# Allegro board VEIP_DLK_CTRL_V00_25APR07_17V2.brd
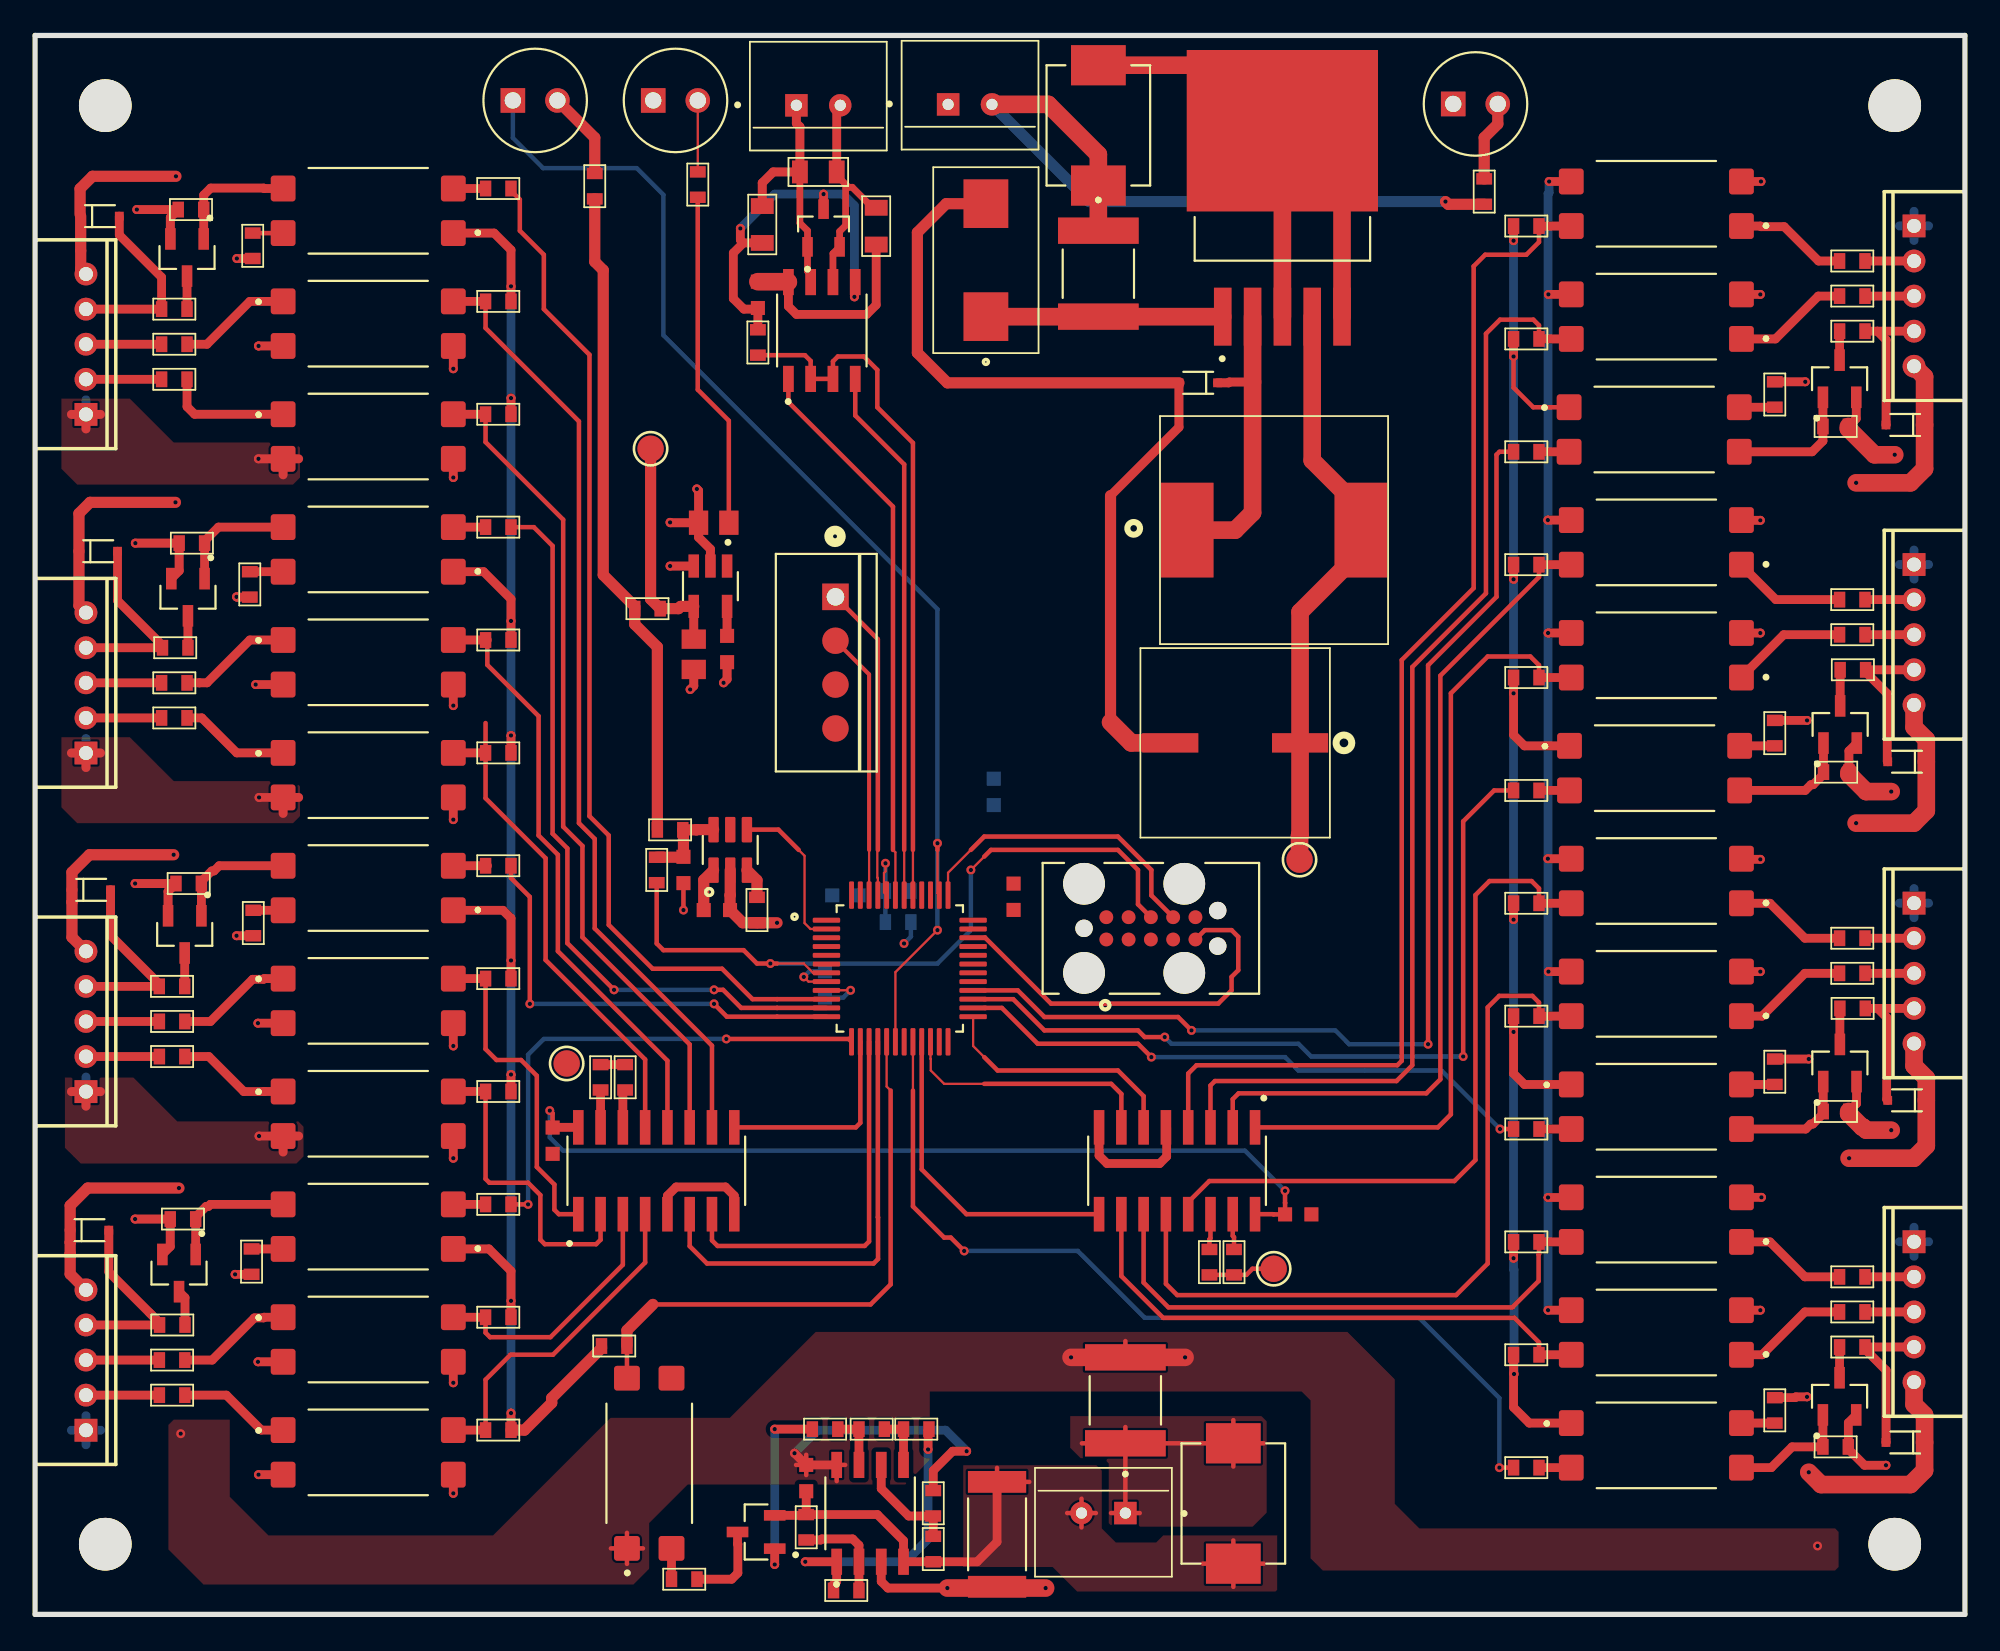
[diagram p0: board, top side]
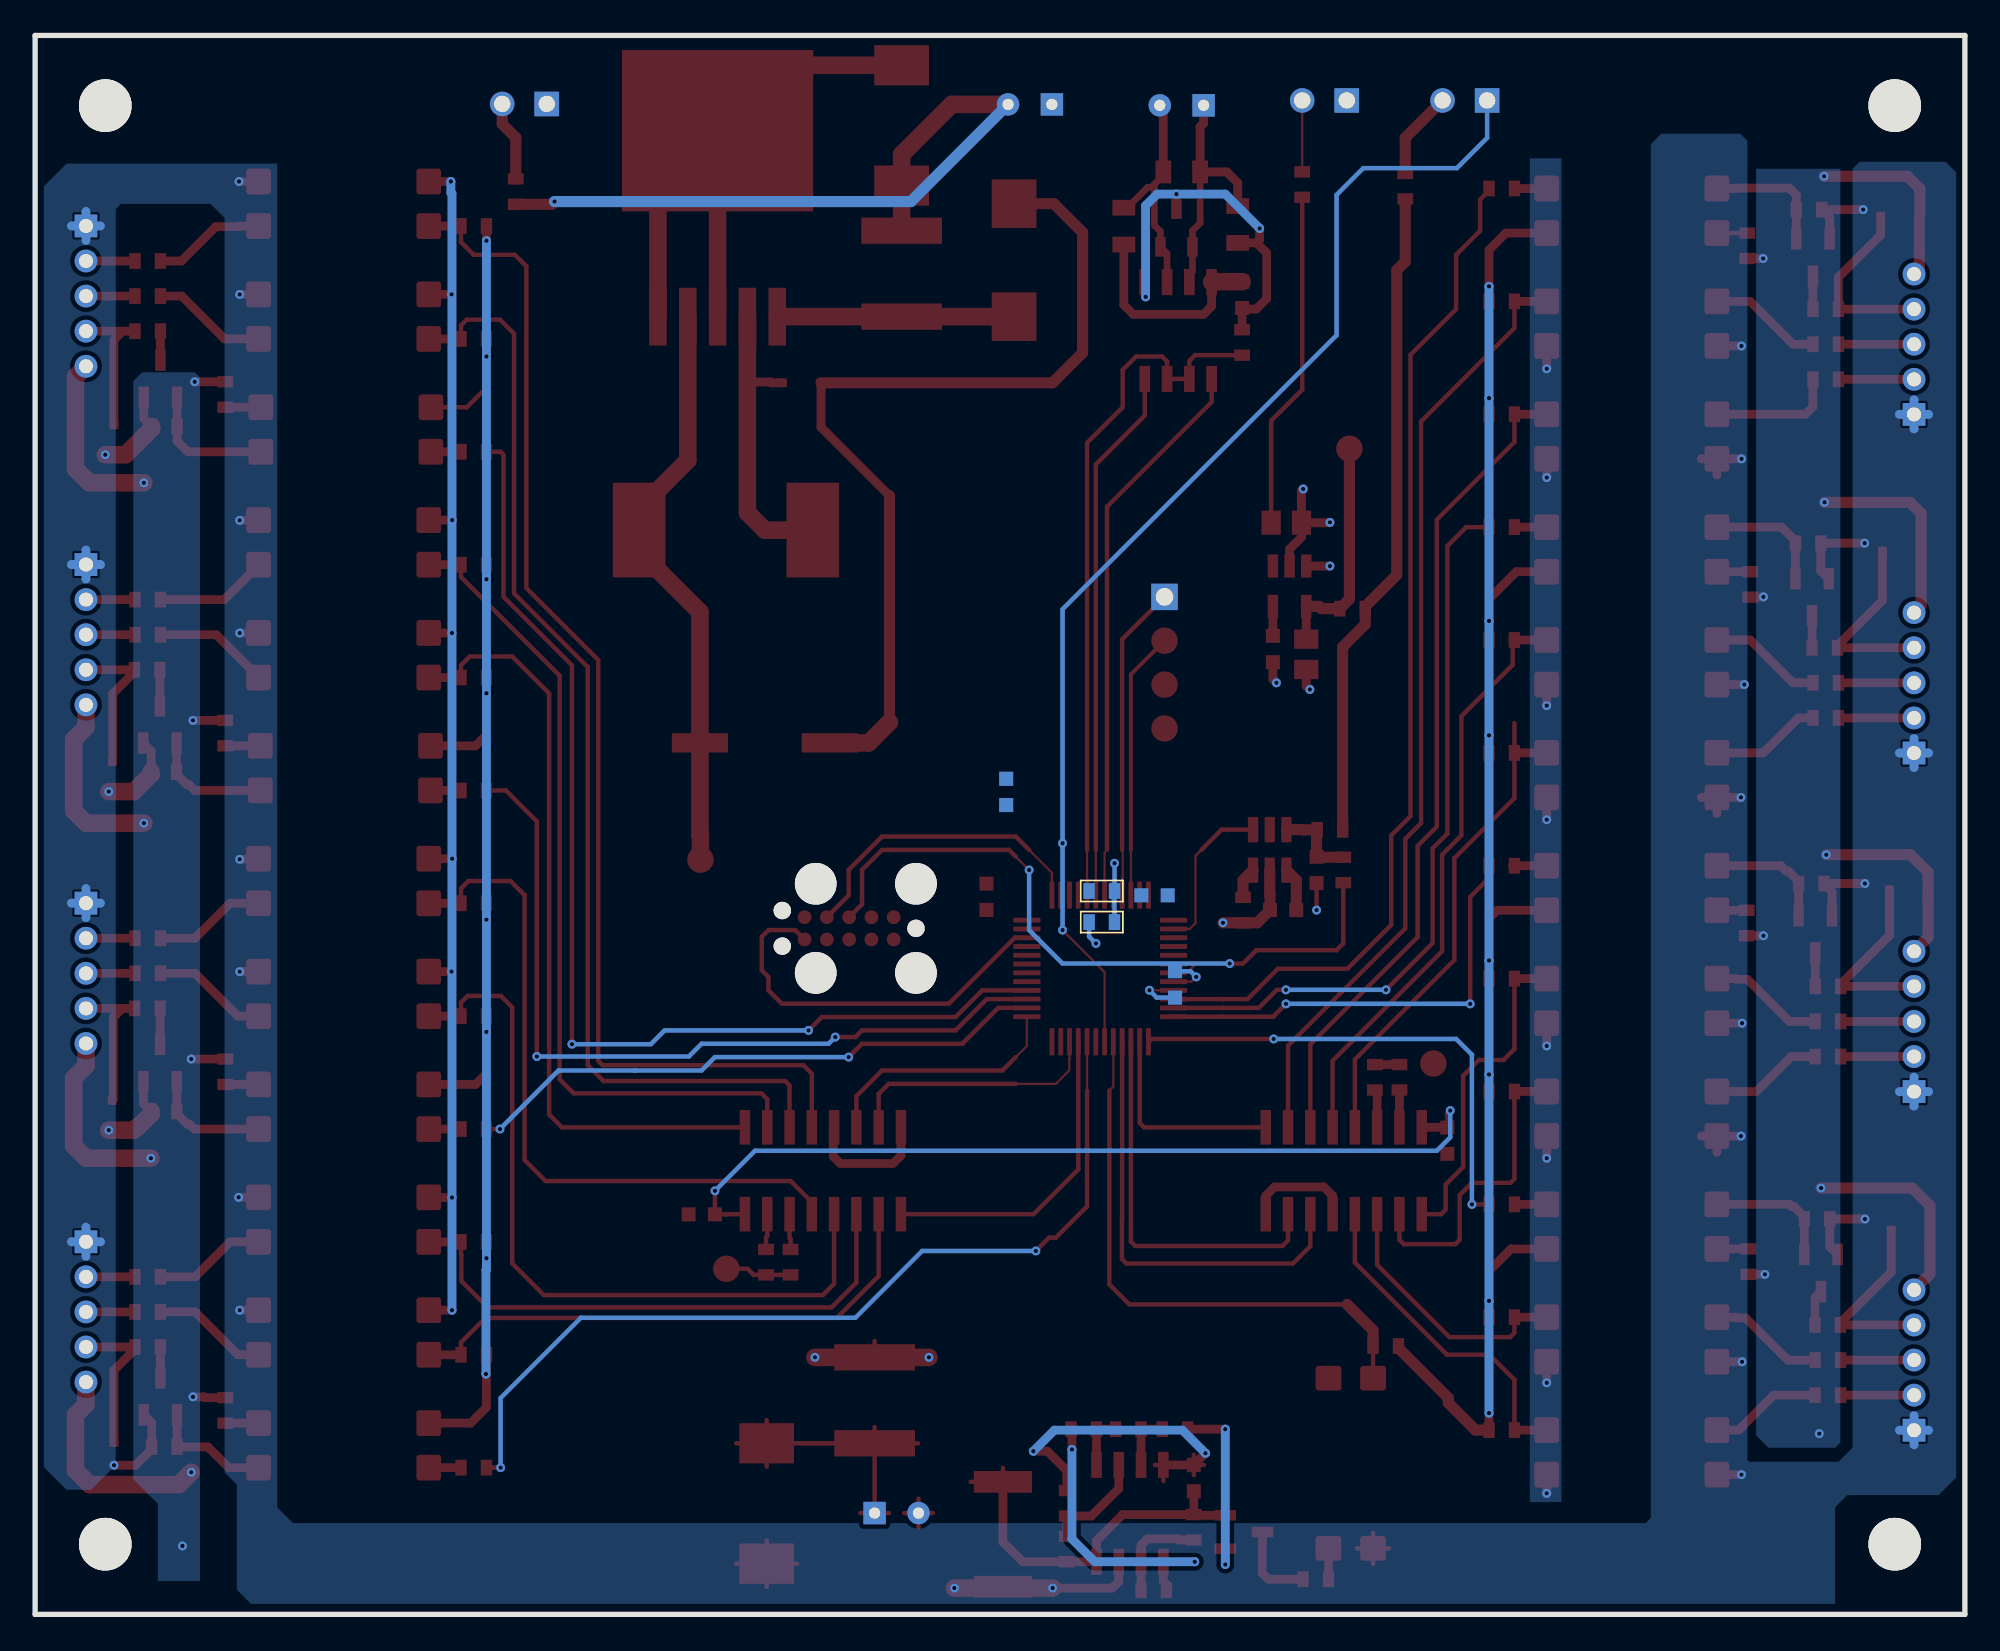
[diagram p1: board, bottom side, seen from below]

Outline 110 x 90 mm; copper layers: TOP, BOTTOM. Coordinates in mm from the lower left corner of the outline.
Outline path: 0,90 0,0 110,0 110,90 0,90

## Design rules (mm)
constraint set DEFAULT: min track width 0.254
nets with their own width: min track width 0.381; nets RS485_A RS485_B
nets with their own width: min track width 0.508; nets GND_FIELD SIGNAL

## Placement (name value [footprint] x y rotation side)
C7  0.1uF  [CAP_885012206026_0603]  36.96 42.43 270 top
C138  0.1uF  [CAP_885012206026_0603]  55.77 40.9 270 top
C139  0.1uF  [CAP_885012206026_0603]  54.65 46.88 90 bottom
C140  0.1uF  [CAP_885012206026_0603]  45.02 35.91 90 bottom
C141  0.1uF  [CAP_885012206026_0603]  46.19 40.99 0 bottom
C144  1uF  [CAP_GRM21BR61A106KE19L_0805]  38.68 62.22 180 top
C145  1uF  [CAP_GRM21BR61A106KE19L_0805]  37.54 54.72 270 top
C146  10nF  [CAP_885012206026_0603]  39.44 55.02 270 top
C147  0.1uF  [CAP_885012206026_0603]  41.2 75.22 270 top
C148  68uF  [CAP_2917_7343]  54.2 77.19 90 top
C149  220uF/50V  [CAPC_220UF_50V_10X10-5]  68.4 49.68 270 top
C150  0.1uF  [CAP_885012206026_0603]  38.86 40.15 0 top
C151  0.1uF  [CAP_885012206026_0603]  29.5 27 270 top
C152  0.1uF  [CAP_885012206026_0603]  72 22.8 0 top
C153  0.1uF  [CAP_885012206026_0603]  43.95 7.77 270 top
D18  S1M  [SOD323F]  3.7 79.7 180 top
D19  S1M  [SOD323F]  3.6 60.6 180 top
D20  S1M  [SOD323F]  3.2 41.3 180 top
D21  S1M  [SOD323F]  3.1 21.9 180 top
D22  S1M  [SOD323F]  106.6 67.8 0 top
D23  S1M  [SOD323F]  106.7 48.6 0 top
D24  S1M  [SOD323F]  106.7 29.3 0 top
D25  S1M  [SOD323F]  106.6 9.8 0 top
D26  LED  [LEDRD254W50D500H1060]  36.5 86.3 0 top
D27  LED  [LEDRD254W50D500H1060]  28.5 86.3 0 top
D28  12V  [DIOM6859X262N]  60.61 84.87 270 top
D29  40V/3A  [SOD323F]  66.3 70.2 0 top
D30  LED  [LEDRD254W50D500H1060]  82.1 86.1 0 top
D31  DIODE TS BI-DIR  [DIOM6859X262N]  68.3 6.32 90 top
ESD3  SM24CANB-02HTG  [SOT23_91P240X115-3N]  44.94 79.03 90 top
F1  PTC  [FUSER_2016L050MR]  60.61 76.42 270 top
F2  PTC  [FUSER_2016L050MR]  62.15 12.2 90 top
J26  CON2  [CON_2_2-5_7-4X5-75]  44.64 86.54 0 top
J27  TC2050-IDC  [TAG-CONNECT_TC2050-IDC]  63.6 39.1 0 top
J28  CON2  [JST_B4B-XH-ALFSN]  45.1 54.25 90 top
J29  CON2  [CON5_2_1190]  2.9 68.4 270 top
J30  CON2  [CON5_2_1190]  2.9 49.1 270 top
J31  CON2  [CON5_2_1190]  2.9 29.8 270 top
J32  CON2  [CON5_2_1190]  107.1 21.24 90 top
J33  CON2  [CON5_2_1190]  107.1 40.54 90 top
J34  CON2  [CON5_2_1190]  107.1 59.84 90 top
J35  CON2  [CON5_2_1190]  2.9 10.5 270 top
J36  CON2  [CON5_2_1190]  107.1 79.14 90 top
J37  CON2  [CON_2_2-5_7-4X5-75]  53.29 86.6 0 top
J38  CON2  [CON_2_2-5_7-4X5-75]  60.9 5.25 180 top
L10  33uH  [IND_CDRH127]  70.62 61.8 0 top
MH5  T POINT R  [MH3P2]  106 4 0 top
MH6  T POINT R  [MH3P2]  4 4 0 top
MH7  T POINT R  [MH3P2]  106 86 0 top
MH8  T POINT R  [MH3P2]  4 86 0 top
MOS1  DMN31D5L-13  [SOT95P240X111-3N]  8.66 77.34 270 top
MOS9  DMN31D5L-13  [SOT95P240X111-3N]  8.71 57.98 270 top
MOS10  DMN31D5L-13  [SOT95P240X111-3N]  8.53 38.76 270 top
MOS11  DMN31D5L-13  [SOT95P240X111-3N]  8.2 19.45 270 top
MOS12  DMN31D5L-13  [SOT95P240X111-3N]  102.85 12.43 90 top
MOS13  DMN31D5L-13  [SOT95P240X111-3N]  102.89 50.72 90 top
MOS14  DMN31D5L-13  [SOT95P240X111-3N]  102.87 31.43 90 top
MOS15  DMN31D5L-13  [SOT95P240X111-3N]  102.86 70.43 90 top
MOS16  DMN31D5L-13  [SOT95P240X111-3N]  41.1 4.7 180 top
NOREF  -  []  0 0 0 top
NOREF#2  -  []  0 0 90 top
R204  10K  [RES_0603_]  49.2 41.23 180 bottom
R205  10K  [RES_0603_]  49.2 39.46 0 bottom
R206  0E  [RES_0603_]  34.91 57.33 180 top
R207  590E  [_RES_0805]  47.94 79.13 90 top
R208  120E  [_RES_0805]  44.64 82.22 180 top
R209  590E  [_RES_0805]  41.45 79.22 270 top
R210  10K  [RES_0603_]  41.2 72.5 90 top
R251  10K  [RES_0603_]  26.4 74.84 180 top
R252  10K  [RES_0603_]  26.4 68.41 180 top
R253  10K  [RES_0603_]  26.4 55.54 180 top
R254  10K  [RES_0603_]  26.4 49.11 180 top
R255  10K  [RES_0603_]  7.94 72.4 180 top
R256  10K  [RES_0603_]  7.94 70.4 180 top
R257  10K  [RES_0603_]  7.94 53.1 180 top
R258  10K  [RES_0603_]  7.94 51.1 180 top
R259  10K  [RES_0603_]  26.4 10.5 180 top
R260  10K  [RES_0603_]  26.4 16.94 180 top
R261  10K  [RES_0603_]  26.4 29.8 180 top
R262  10K  [RES_0603_]  26.4 36.24 180 top
R263  10K  [RES_0603_]  7.81 33.8 180 top
R264  10K  [RES_0603_]  7.81 31.8 180 top
R265  10K  [RES_0603_]  7.81 14.5 180 top
R266  10K  [RES_0603_]  7.81 12.5 180 top
R267  10K  [RES_0603_]  85 40.53 0 top
R268  10K  [RES_0603_]  85 34.1 0 top
R269  10K  [RES_0603_]  85 21.23 0 top
R270  10K  [RES_0603_]  85 14.8 0 top
R271  10K  [RES_0603_]  103.58 17.24 0 top
R272  10K  [RES_0603_]  103.58 19.24 0 top
R273  10K  [RES_0603_]  103.58 36.54 0 top
R274  10K  [RES_0603_]  103.58 38.54 0 top
R275  10K  [RES_0603_]  85 79.14 0 top
R276  10K  [RES_0603_]  85 72.7 0 top
R277  10K  [RES_0603_]  85 59.83 0 top
R278  10K  [RES_0603_]  85 53.4 0 top
R279  10K  [RES_0603_]  103.58 55.84 0 top
R280  10K  [RES_0603_]  103.58 57.84 0 top
R281  10K  [RES_0603_]  103.58 75.14 0 top
R282  10K  [RES_0603_]  103.58 77.14 0 top
R283  10K  [RES_0603_]  7.94 74.4 0 top
R287  10K  [RES_0603_]  12.4 78.01 270 top
R299  10K  [RES_0603_]  26.4 81.28 0 top
R312  10K  [RES_0603_]  37.77 81.5 90 top
R313  10K  [RES_0603_]  31.9 81.41 90 top
R314  10K  [RES_0603_]  82.6 81.1 90 top
R322  10K  [RES_0603_]  8.89 80.08 180 top
R323  10K  [RES_0603_]  7.99 55.1 0 top
R324  10K  [RES_0603_]  12.24 58.71 270 top
R325  10K  [RES_0603_]  26.4 61.97 0 top
R326  10K  [RES_0603_]  8.94 61.06 180 top
R327  10K  [RES_0603_]  7.8 35.8 0 top
R328  10K  [RES_0603_]  12.44 39.41 270 top
R329  10K  [RES_0603_]  26.4 42.67 0 top
R330  10K  [RES_0603_]  8.75 41.66 180 top
R331  10K  [RES_0603_]  7.82 16.5 0 top
R332  10K  [RES_0603_]  12.34 20.11 270 top
R333  10K  [RES_0603_]  26.4 23.37 0 top
R334  10K  [RES_0603_]  8.43 22.53 180 top
R335  10K  [RES_0603_]  103.58 15.24 180 top
R336  10K  [RES_0603_]  99.16 11.63 90 top
R337  10K  [RES_0603_]  85 8.36 180 top
R338  10K  [RES_0603_]  102.63 9.55 0 top
R339  0E  [RES_0603_]  33.63 30.61 90 top
R340  0E  [RES_0603_]  32.23 30.61 90 top
R341  0E  [RES_0603_]  66.94 20.08 270 top
R342  0E  [RES_0603_]  68.34 20.08 270 top
R343  10K  [RES_0603_]  103.61 53.84 180 top
R344  10K  [RES_0603_]  99.16 50.23 90 top
R345  10K  [RES_0603_]  85 46.96 180 top
R346  10K  [RES_0603_]  102.66 48.01 0 top
R347  10K  [RES_0603_]  103.6 34.54 180 top
R348  10K  [RES_0603_]  99.16 30.93 90 top
R349  10K  [RES_0603_]  85 27.67 180 top
R350  10K  [RES_0603_]  102.65 28.67 0 top
R351  10K  [RES_0603_]  103.58 73.14 180 top
R352  10K  [RES_0603_]  99.16 69.53 90 top
R353  10K  [RES_0603_]  85 66.27 180 top
R354  10K  [RES_0603_]  102.63 67.71 0 top
R355  0E  [RES_0603_]  35.43 42.43 270 top
R356  10K  [RES_0603_]  36.2 44.72 0 top
R357  500E  [RES_0603_]  41.15 40.15 270 top
R358  1k  [RES_0603_]  51.2 3.72 90 top
R359  10K  [RES_0603_]  51.2 6.33 90 top
R361  3.3K  [RES_0603_]  33.01 15.3 180 top
R362  100E  [RES_0603_]  45.03 10.56 0 top
R363  100E  [RES_0603_]  37 2 0 top
R364  0.1E  [RES2512_6331X70N]  54.83 4.56 90 top
R365  1k  [RES_0603_]  43.95 4.96 270 top
R366  18K  [RES_0603_]  46.24 1.36 180 top
R367  10K  [RES_0603_]  47.69 10.56 0 top
R368  18K  [RES_0603_]  50.23 10.56 180 top
TP15  T POINT R  [TP]  35.08 66.44 270 top
TP16  TEST POINT  [TP]  72.08 43.02 270 top
TP17  TEST POINT  [TP]  30.3 31.4 0 top
TP18  TEST POINT  [TP]  70.6 19.7 0 top
U8  TPL5010DDCR  [SOT95P280X110-6N]  39.62 43.58 90 top
U9  SNx4HC148  [SOIC127P600X175-16N]  35.41 25.29 90 top
U34  STM32F103C8T6TR  [QFP50P900X900X160-48N]  49.29 36.82 0 top
U36  SPX3819M5  [SOT95P280X145-5N]  38.49 58.61 270 top
U37  SN65176BDR  [SOIC127P600X137-8N]  44.84 73.18 90 top
U53  LM2596R  [U_TO263-5L]  71.1 79.27 90 top
U54  EL817STU  [SOIC254P1030X460-4N]  18.99 73.57 0 top
U55  EL817STU  [SOIC254P1030X460-4N]  18.99 67.14 0 top
U56  EL817STU  [SOIC254P1030X460-4N]  18.99 54.27 0 top
U57  EL817STU  [SOIC254P1030X460-4N]  18.99 47.84 0 top
U58  EL817STU  [SOIC254P1030X460-4N]  18.99 34.97 0 top
U59  EL817STU  [SOIC254P1030X460-4N]  18.99 28.53 0 top
U60  EL817STU  [SOIC254P1030X460-4N]  18.99 15.67 0 top
U61  EL817STU  [SOIC254P1030X460-4N]  18.99 9.23 0 top
U62  EL817STU  [SOIC254P1030X460-4N]  92.41 16.07 180 top
U63  EL817STU  [SOIC254P1030X460-4N]  92.41 22.5 180 top
U64  EL817STU  [SOIC254P1030X460-4N]  92.41 35.37 180 top
U65  EL817STU  [SOIC254P1030X460-4N]  92.41 41.8 180 top
U66  EL817STU  [SOIC254P1030X460-4N]  92.41 54.67 180 top
U67  EL817STU  [SOIC254P1030X460-4N]  92.41 61.1 180 top
U68  EL817STU  [SOIC254P1030X460-4N]  92.41 73.97 180 top
U69  EL817STU  [SOIC254P1030X460-4N]  92.41 80.41 180 top
U70  EL817STU  [SOIC254P1030X460-4N]  18.99 80.01 180 top
U71  EL817STU  [SOIC254P1030X460-4N]  18.99 60.7 180 top
U72  EL817STU  [SOIC254P1030X460-4N]  18.99 41.4 180 top
U73  EL817STU  [SOIC254P1030X460-4N]  18.99 22.1 180 top
U74  EL817STU  [SOIC254P1030X460-4N]  92.41 9.63 0 top
U75  SNx4HC148  [SOIC127P600X175-16N]  65.09 25.29 270 top
U76  EL817STU  [SOIC254P1030X460-4N]  92.31 48.24 0 top
U77  EL817STU  [SOIC254P1030X460-4N]  92.41 28.94 0 top
U78  EL817STU  [SOIC254P1030X460-4N]  92.29 67.54 0 top
U82  EL817STU  [SOIC254P1030X460-4N]  35.01 8.61 90 top
U94  LM358  [SOIC127P600X137-8N]  47.6 5.76 90 top

## Library data of the parts
C7 C138-C141 C150-C153 = CAP_0603_+/-10%_50V_0.1uF
C144-C146 = CAP NP
C147 = CAP_0603_+/-20%_50V_0.1uF
C148 = CAP
C149 = CAPACITOR
D18-D25 = DIODE_7
D26 D27 D30 = LED_0
D28 D31 = DIODE TS BI-DIR
D29 = DIODE SCHOTTKY_0
ESD3 = ESD_CAN_SM24CANB
F1 F2 = PTC
J26 = CON2_0
J27 = TC2050-IDC_5
J28-J36 = CON2_4
J37 J38 = CON2_3
L10 = INDUCTOR
MH5-MH8 TP15 = T POINT R
MOS1 MOS9-MOS16 = BSS138/SOT_0
R204-R206 R210 R251-R283 R287 R299 R312-R314 R322-R359 R361-R368 = RESISTOR
R207 R209 = RES_0603_5%_0.12K
R208 = RES_0805_1%_100E
TP16-TP18 = TEST POINT_2
U8 = TPL5010DDCR_0
U9 U75 = 74HC148_2
U34 = STM32F103C8T6TR_5
U36 = SPX3819M5_0
U37 = IC_LVL_RS485_SN65176BDR
U53 = LM2596R_1
U54-U74 U76-U78 U82 = EL817STU
U94 = LM358_1

## Footprints (pads in the part's own frame, mm; a bottom-side part is the same pattern mirrored in y, then rotated)
_RES_0805
  rect 0.9x1.3 smd: 1(-1.05,0) 2(1.05,0)
CAP_2917_7343
  rect 2.77x2.55 smd: 1(-3.22,0) 2(3.22,0)
CAP_885012206026_0603
  rect 0.8x0.8 smd: 1(-0.75,0) 2(0.75,0)
CAP_GRM21BR61A106KE19L_0805
  rect 1.1x1.38 smd: 1(-0.863,0) 2(0.863,0)
CAPC_220UF_50V_10X10-5
  rect 1.1x3.2 smd: 1(0,3.7) 2(0,-3.7)
CON5_2_1190
  rect 1.3x1.3 hole 0.8: 1(0,0)
  round 1.3 hole 0.8: 2(-2,0) 3(-4,0) 4(-6,0) 5(-8,0)
CON_2_2-5_7-4X5-75
  rect 1.28x1.28 hole 0.64: 1(-1.25,-0.525)
  round 1.28 hole 0.64: 2(1.25,-0.525)
DIOM6859X262N
  rect 2.29x3.12 smd: 1(-3.43,0) 2(3.43,0)
FUSER_2016L050MR
  rect 1.5x4.6 smd: 1(-2.45,0) 2(2.45,0)
IND_CDRH127
  rect 3x5.4 smd: 1(-4.95,0) 2(4.95,0)
JST_B4B-XH-ALFSN
  rect 1.508x1.508 hole 1: 1(3.75,-0.525)
  round 1.508 smd: 2(1.25,-0.525) 3(-1.25,-0.525) 4(-3.75,-0.525)
LEDRD254W50D500H1060
  round 1.4 hole 0.93: A(1.27,0)
  rect 1.4x1.4 hole 0.93: C(-1.27,0)
MH3P2
  round 3 hole 3.2 unplated: (0,0)
QFP50P900X900X160-48N
  custom 1.56x0.28 smd: 1(-4.18,2.75) 2(-4.18,2.25) 3(-4.18,1.75) 4(-4.18,1.25) 5(-4.18,0.75) 6(-4.18,0.25) 7(-4.18,-0.25) 8(-4.18,-0.75) 9(-4.18,-1.25) 10(-4.18,-1.75) 11(-4.18,-2.25) 12(-4.18,-2.75) 25(4.18,-2.75) 26(4.18,-2.25) 27(4.18,-1.75) 28(4.18,-1.25) 29(4.18,-0.75) 30(4.18,-0.25) 31(4.18,0.25) 32(4.18,0.75) 33(4.18,1.25) 34(4.18,1.75) 35(4.18,2.25) 36(4.18,2.75)
  custom 0.28x1.56 smd: 13(-2.75,-4.18) 14(-2.25,-4.18) 15(-1.75,-4.18) 16(-1.25,-4.18) 17(-0.75,-4.18) 18(-0.25,-4.18) 19(0.25,-4.18) 20(0.75,-4.18) 21(1.25,-4.18) 22(1.75,-4.18) 23(2.25,-4.18) 24(2.75,-4.18) 37(2.75,4.18) 38(2.25,4.18) 39(1.75,4.18) 40(1.25,4.18) 41(0.75,4.18) 42(0.25,4.18) 43(-0.25,4.18) 44(-0.75,4.18) 45(-1.25,4.18) 46(-1.75,4.18) 47(-2.25,4.18) 48(-2.75,4.18)
RES2512_6331X70N
  rect 1.24x3.32 smd: 1(-2.99,0) 2(2.99,0)
RES_0603_
  rect 0.65x0.9 smd: 1(-0.725,0) 2(0.725,0)
SOD323F
  rect 0.5x0.5 smd: A(-1.1,0) C(1.1,0)
SOIC127P600X137-8N
  rect 1.49x0.61 smd: 1(-2.76,1.905) 2(-2.76,0.635) 3(-2.76,-0.635) 4(-2.76,-1.905) 5(2.76,-1.905) 6(2.76,-0.635) 7(2.76,0.635) 8(2.76,1.905)
SOIC127P600X175-16N
  rect 1.97x0.6 smd: 1(-2.475,4.445) 2(-2.475,3.175) 3(-2.475,1.905) 4(-2.475,0.635) 5(-2.475,-0.635) 6(-2.475,-1.905) 7(-2.475,-3.175) 8(-2.475,-4.445) 9(2.475,-4.445) 10(2.475,-3.175) 11(2.475,-1.905) 12(2.475,-0.635) 13(2.475,0.635) 14(2.475,1.905) 15(2.475,3.175) 16(2.475,4.445)
SOIC254P1030X460-4N
  custom 1.41x1.47 smd: 1(-4.85,1.27) 2(-4.85,-1.27) 3(4.85,-1.27) 4(4.85,1.27)
SOT23_91P240X115-3N
  rect 1.12x0.6 smd: 1(-1.075,0.915) 2(-1.075,-0.915) 3(1.075,0)
SOT95P240X111-3N
  rect 1.23x0.6 smd: 1(-1.06,0.95) 2(-1.06,-0.95) 3(1.06,0)
SOT95P280X110-6N
  custom 1.45x0.59 smd: 1(-1.155,0.95) 2(-1.155,0) 3(-1.155,-0.95) 4(1.155,-0.95) 5(1.155,0) 6(1.155,0.95)
SOT95P280X145-5N
  rect 1.32x0.6 smd: 1(-1.15,0.95) 2(-1.15,0) 3(-1.15,-0.95) 4(1.15,-0.95) 5(1.15,0.95)
TAG-CONNECT_TC2050-IDC
  round 2.375 hole 2.375 unplated: (-3.81,2.54) (-3.81,-2.54) (1.905,2.54) (1.905,-2.54)
  round 0.991 hole 0.991 unplated: (-3.81,0) (3.81,1.015) (3.81,-1.015)
  round 0.787 smd: 1(-2.54,-0.635) 2(-1.27,-0.635) 3(0,-0.635) 4(1.27,-0.635) 5(2.54,-0.635) 6(2.54,0.635) 7(1.27,0.635) 8(0,0.635) 9(-1.27,0.635) 10(-2.54,0.635)
TP
  round 1.508 smd: 1(0,0)
U_TO263-5L
  rect 3.3x1 smd: 1(-5.3,3.4) 2(-5.3,1.7) 3(-5.3,0) 4(-5.3,-1.7) 5(-5.3,-3.4)
  rect 9.2x10.9 smd: 6(5.3,0)

## Nets
+VCC_3.3V: C150.1 U8.1
+VCC_3V3: C145.1 C147.1 R206.1 R207.1 R251.1 R252.1 R253.1 R254.1 R259.1 R260.1 R261.1 R262.1 R267.1 R268.1 R269.1 R270.1 R275.1 R276.1 R277.1 R278.1 R361.2 TP15.1(TP) U36.4(VOUT) U37.8(VCC) U70.1 U71.1 U72.1 U73.1 U74.1 U76.1 U77.1 U78.1
+VCC_5P0: C144.1 J28.3 R312.1 U36.1 U36.3
+VCC_CTRL: C138.1 C139.1 C140.1 C141.1 J27.10 R204.1 R206.2 R313.1 R356.1 U34.9 U34.24 U34.36 U34.48
+VCC_ISO_5V: C149.1 L10.2 TP16.1 U53.4
+VCC_ISO_12V: C153.1 D18.C(K) D19.C(K) D20.C(K) D21.C(K) D22.C(K) D23.C(K) D24.C(K) D25.C(K) F2.2 J29.5 J30.5 J31.5 J32.5 J33.5 J34.5 J35.5 J36.5 R287.2 R324.2 R328.2 R332.2 R336.2 R344.2 R348.2 R352.2 R359.2 U82.1 U94.8
GND: C7.2 C138.2 C139.2 C140.2 C141.2 C144.2 C145.2 C146.2 C147.2 C148.2 C149.2 C150.2 C151.2 C152.2 D26.C(CATHODE) D28.1 D29.A D30.C(CATHODE) ESD3.3 J27.2 J28.4 J37.1 R205.2 R209.2 R210.2 R357.2 U8.2 U9.5 U9.8 U34.8(VSSA) U34.23 U34.35 U34.47 U36.2 U37.5 U53.3 U53.5 U53.6 U54.3(ET) U55.3(ET) U56.3(ET) U57.3(ET) U58.3(ET) U59.3(ET) U60.3(ET) U61.3(ET) U62.3(ET) U63.3(ET) U64.3(ET) U65.3(ET) U66.3(ET) U67.3(ET) U68.3(ET) U69.3(ET) U75.5 U75.8 U82.3(ET)
GND_FIELD SIGNAL: J29.1 J30.1 J31.1 J32.1 J33.1 J34.1 J35.1 J36.1 MOS1.2(S) MOS9.2(S) MOS10.2(S) MOS11.2(S) MOS12.2(S) MOS13.2(S) MOS14.2(S) MOS15.2(S) R322.2 R326.2 R330.2 R334.2 R338.2 R346.2 R350.2 R354.2 R364.1 U54.2 U55.2 U56.2 U57.2 U58.2 U59.2 U60.2 U61.2 U62.2 U63.2 U64.2 U65.2 U66.2 U67.2 U68.2 U69.2 U94.3
VCC_+3.3V: C151.1 C152.1 U9.16(VCC) U75.16(VCC)
0: C153.2 D31.1 J38.2 MOS16.2(S) R358.1 R364.2 R365.1 U94.4
CTRL_BOOT0: R204.2 R205.1 U34.44
CTRL_WDI_3.3V: U8.4 U34.2
DATA1: U9.9 U34.14
DATA2: U9.7 U34.15
DATA3: U9.6 U34.16
DATA4: U34.21 U75.9
DATA5: U34.22 U75.7
DATA6: U34.25 U75.6
I2C1_SCL: J28.1 U34.45
I2C1_SDA: J28.2 U34.46
LIVE_LED: D27.C(CATHODE) U34.18 U34.38
LOCK_CTRL_1: R299.2 U34.10
LOCK_CTRL_2: R325.2 U34.11
LOCK_CTRL_3: R329.2 U34.12
LOCK_CTRL_4: R333.2 U34.13
LOCK_CTRL_5: R337.2 U34.20
LOCK_CTRL_6: R349.2 U34.26
LOCK_CTRL_7: R345.2 U34.27
LOCK_CTRL_8: R353.2 U34.28
LOCK_DRV1: MOS1.1 R322.1 U70.3(ET)
LOCK_DRV2: MOS9.1 R326.1 U71.3(ET)
LOCK_DRV3: MOS10.1 R330.1 U72.3(ET)
LOCK_DRV4: MOS11.1 R334.1 U73.3(ET)
LOCK_DRV5: MOS12.1 R338.1 U74.3(ET)
LOCK_DRV6: MOS14.1 R350.1 U77.3(ET)
LOCK_DRV7: MOS13.1 R346.1 U76.3(ET)
LOCK_DRV8: MOS15.1 R354.1 U78.3(ET)
LOCK_OCD: R361.1 U34.17 U82.4
LOCK_OP_1: R252.2 U9.11 U55.4
LOCK_OP_2: R254.2 U9.13 U57.4
LOCK_OP_3: R261.2 U9.2 U59.4
LOCK_OP_4: R259.2 U9.4 U61.4
LOCK_OP_5: R269.2 U63.4 U75.11
LOCK_OP_6: R267.2 U65.4 U75.13
LOCK_OP_7: R277.2 U67.4 U75.2
LOCK_OP_8: R275.2 U69.4 U75.4
LOCK_OP_RET_1: J29.2 R256.2
LOCK_OP_RET_2: J30.2 R258.2
LOCK_OP_RET_3: J31.2 R264.2
LOCK_OP_RET_4: J35.2 R266.2
LOCK_OP_RET_5: J32.2 R272.2
LOCK_OP_RET_6: J33.2 R274.2
LOCK_OP_RET_7: J34.2 R280.2
LOCK_OP_RET_8: J36.2 R282.2
LOCK_RET_1: D18.A J29.4 R283.1
LOCK_RET_2: D19.A J30.4 R323.1
LOCK_RET_3: D20.A J31.4 R327.1
LOCK_RET_4: D21.A J35.4 R331.1
LOCK_RET_5: D25.A J32.4 R335.1
LOCK_RET_6: D24.A J33.4 R347.1
LOCK_RET_7: D23.A J34.4 R343.1
LOCK_RET_8: D22.A J36.4 R351.1
LOCK_STAT_RET_1: J29.3 R255.2
LOCK_STAT_RET_2: J30.3 R257.2
LOCK_STAT_RET_3: J31.3 R263.2
LOCK_STAT_RET_4: J35.3 R265.2
LOCK_STAT_RET_5: J32.3 R271.2
LOCK_STAT_RET_6: J33.3 R273.2
LOCK_STAT_RET_7: J34.3 R279.2
LOCK_STAT_RET_8: J36.3 R281.2
LOCK_STATUS_1: R251.2 U9.10 U54.4
LOCK_STATUS_2: R253.2 U9.12 U56.4
LOCK_STATUS_3: R262.2 U9.1 U58.4
LOCK_STATUS_4: R260.2 U9.3 U60.4
LOCK_STATUS_5: R270.2 U62.4 U75.10
LOCK_STATUS_6: R268.2 U64.4 U75.12
LOCK_STATUS_7: R278.2 U66.4 U75.1
LOCK_STATUS_8: R276.2 U68.4 U75.3
PWM: U34.39
RS485_A: ESD3.2 J26.2 R207.2 R208.1 U37.6
RS485_B: ESD3.1 J26.1 R208.2 R209.1 U37.7
RS485_EN: R210.1 U34.41 U37.2 U37.3
RS485_RXD: U34.43 U37.1
RS485_TXD: U34.42 U37.4
STM32_RST: J27.8 R355.2 U34.7
SWCLK: J27.7 U34.37
SWDIO: J27.5 U34.34
N260241: C146.1 U36.5
N347898: D26.A R312.2
N347900: D27.A R313.2
N349606: D28.2 F1.1 J37.2 R314.1
N349618: C148.1 F1.2 U53.1
N349698: D29.C(CATHODE) L10.1 U53.2(VOUT)
N351019: D30.A R314.2
N370351: R255.1 U54.1
N370463: R256.1 U55.1
N371249: R265.1 U60.1
N371337: R266.1 U61.1
N372751: R258.1 U57.1
N373087: R257.1 U56.1
N374541: R263.1 U58.1
N374619: R264.1 U59.1
N384334: R287.1 U70.4
N384366: R299.1 U70.2
N385358: MOS1.3 R283.2
N386684: R279.1 U66.1
N386792: R280.1 U67.1
N386994: R281.1 U68.1
N387120: R282.1 U69.1
N388890: R273.1 U64.1
N389042: R274.1 U65.1
N391500: MOS9.3 R323.2
N391578: R324.1 U71.4
N391632: R325.1 U71.2
N392535: MOS10.3 R327.2
N392613: R328.1 U72.4
N392667: R329.1 U72.2
N394132: MOS11.3 R331.2
N394210: R332.1 U73.4
N394264: R333.1 U73.2
N395070: R271.1 U62.1
N395178: R272.1 U63.1
N396604: MOS12.3 R335.2
N396682: R336.1 U74.4
N396736: R337.1 U74.2
N412537: MOS13.3 R343.2
N412615: R344.1 U76.4
N412669: R345.1 U76.2
N414015: MOS14.3 R347.2
N414093: R348.1 U77.4
N414147: R349.1 U77.2
N414563: MOS15.3 R351.2
N414641: R352.1 U78.4
N414695: R353.1 U78.2
N415975: R339.1 U9.14
N415995: R339.2 R340.2 TP17.1
N416039: R340.1 U9.15
N416099: R341.1 U75.14
N416119: R341.2 R342.2 TP18.1
N416157: R342.1 U75.15
N423449: C7.1 R355.1 R356.2 U8.6
N423585: R357.1 U8.3
N513484: MOS16.3 R363.2
N513492: R363.1 U82.2
N513610: R362.2 R367.1 U94.7(OUT)
N513618: MOS16.1 R362.1
N514476: D31.2 F2.1 J38.1
N516445: R358.2 R359.1 U94.6
N517983: R366.2 R368.1 U94.1
N517995: R365.2 R366.1 U94.2
N519099: R367.2 R368.2 U94.5

Pads without a net: J27 1 3 4 6 9; U8 5; U34 1 3 4 5 6 19 29 30 31 32 33 40

## Via types
v1: diameter 0.51, hole 0.249, TOP to BOTTOM, 119 vias

## Routing (per net, layer and track width the routed paths; a pad name or vN(x,y) marks a point on that pad's centre or on a via; arc(x,y) is an arc through that point)
+VCC_3.3V: length 2.5
  TOP w0.635: C150.1 38.11,41.86 U8.1
+VCC_3V3: length 221.7
  TOP w0.254: U78.1 85.39,68.81 84.27,69.93 v1(84.27,71.7)
  TOP w0.5: v1(27.13,69.33) R252.1 ; 84.27,13.73 84.27,11.8 85.17,10.9 U74.1 ; 84.27,13.73 R270.1 ; 84.27,13.73 v1(84.3,13.7) ; R260.1 v1(27.13,17.87) 27.13,19.57 25.87,20.83 U73.1 ; R251.1 v1(27.13,75.7) 27.13,77.77 26.16,78.74 U70.1 ; R267.1 v1(84.27,39.6) ; U71.1 25.57,59.43 27.13,57.87 v1(27.13,56.63) R253.1 ; R262.1 v1(27.13,37.27) 27.13,39.67 26.67,40.13 U72.1 ; R277.1 v1(84.27,59) ; R275.1 v1(84.27,78.3) ; v1(27.13,30.77) R261.1 ; U37.8 42.94,74.56 43.4,74.1 47.4,74.1 47.94,74.64 R207.1 ; U76.1 84.89,49.51 84.27,50.13 v1(84.27,52.5) R278.1 ; R269.1 v1(84.27,20.3) ; R276.1 v1(84.27,71.7) ; U77.1 84.89,30.21 84.27,30.83 v1(84.27,33.2) R268.1 ; R254.1 v1(27.13,50.1) ; v1(27.13,11.47) R259.1
  TOP w0.508: U36.4 C145.1
  TOP w0.635: TP15.1 35.08,57.87 R206.1 36.67,57.33 36.8,57.46 U36.4 ; R259.1 27.9,10.5 29.45,12.06 29.45,12.33 32.29,15.17 R361.2
  TOP w1: U37.8 42.91,75.97 C147.1
  BOTTOM w0.5: v1(27.13,11.47) v1(27.13,17.87) v1(27.13,30.77) v1(27.13,37.27) v1(27.13,50.1) v1(27.13,56.63) v1(27.13,69.33) v1(27.13,75.7) ; v1(84.3,13.7) 84.3,19.64 84.27,19.67 v1(84.27,20.3) v1(84.27,33.2) v1(84.27,39.6) v1(84.27,52.5) v1(84.27,59) v1(84.27,71.7) v1(84.27,78.3)
+VCC_5P0: length 20.6
  TOP w0.254: R312.1 37.77,69.81 39.54,68.04 C144.1
  TOP w0.508: U36.3 v1(36.2,59.76)
+VCC_CTRL: length 40.5
  TOP w0.127: U34.9 45.11,35.57 v1(46.48,35.57)
  TOP w0.635: R356.1 35.47,55.14 34.18,56.43 R206.2 34.18,57.45 32.38,59.25 32.38,76.62 31.9,77.1 R313.1
  BOTTOM w0.254: v1(46.48,35.57) 46.07,35.16 C140.1
+VCC_ISO_5V: length 33.5
  TOP w1: U53.4 72.8,65.78 75.57,63 L10.2 75.57,60.6 72.1,57.14 C149.1 72.1,44.43 72.08,44.4 TP16.1
+VCC_ISO_12V: length 139
  TOP w0.254: U82.1 33.74,4.64 ; U82.1 32.82,3.76 ; U82.1 34.65,3.76 ; U82.1 33.74,2.88 ; F2.2 62.15,15.58 ; F2.2 64.62,14.65 ; F2.2 59.67,14.65 ; 45.21,8.52 U94.8 ; U94.8 45.69,7.6 ; U94.8 46.17,8.52 ; 43.38,8.52 C153.1 ; C153.1 43.95,7.94 ; C153.1 43.95,9.1
  TOP w0.5: R348.2 v1(101.1,31.66) ; v1(11.48,58) 11.5,58 11.52,57.98 R324.2 ; U94.8 45.69,8.52 C153.1 v1(43.29,9.19) ; R352.2 v1(100.9,70.26) ; R336.2 100.32,12.35 100.37,12.4 v1(101,12.4) ; R328.2 v1(11.48,38.68) ; 2.56,79.8 2.56,77.76 2.6,77.73 ; R359.2 51.2,8.2 52.3,9.3 v1(53.1,9.3) ; v1(11.4,19.38) R332.2 ; v1(11.5,77.29) R287.2 ; R344.2 v1(101,50.96) ; U82.1 33.7,3.8
  TOP w0.635: v1(8.03,81.97) 3.27,81.97 2.56,81.26 2.56,79.8 ; D18.C 2.6,76.7 J29.5 ; v1(8.2,24.3) 3,24.3 2,23.3 D21.C 2,21.21 2,20.56 2,19.4 J35.5 ; J30.5 2.5,57.5 D19.C 2.5,62.75 3.13,63.39 v1(8,63.39) ; v1(7.9,43.3) 3.1,43.3 2.1,42.3 D20.C 2.1,40.61 2.1,40.6 2.1,38.6 J31.5
  TOP w1: v1(101.1,8.1) 101.8,7.4 106.89,7.4 107.7,8.21 D25.C 107.7,11.36 107.1,11.96 J32.5 ; v1(65.55,14.65) F2.2 v1(59.05,14.65) ; v1(103.8,45.1) 107.09,45.1 107.8,45.81 D23.C 107.8,49.87 107.1,50.57 J34.5 ; v1(103.4,26) 107.09,26 107.8,26.71 D24.C 107.8,30.56 107.1,31.26 J33.5 ; v1(103.8,64.5) 106.9,64.5 107.7,65.3 D22.C 107.7,70.54 J36.5
  BOTTOM w0.5: v1(43.29,9.19) 44.6,10.5 51.9,10.5 v1(53.1,9.3)
  vias: v1(8.3,10.3) v1(101.6,3.9)
GND: length 227.6
  TOP w0.127: U34.8 44.08,36.07 v1(43.81,36.34)
  TOP w0.254: C7.2 v1(36.96,40.15)
  TOP w0.5: ESD3.3 v1(44.94,80.96) ; U75.8 60.65,26.15 61.1,25.7 64.1,25.7 64.5,26.1 64.5,27.72 U75.5 ; U9.8 39.85,23.86 39.35,24.36 36.54,24.36 36.04,23.86 U9.5 ; v1(40.2,79) 40.2,78.35 40.37,78.17 ; v1(23.84,6.9) U61.3 ; R210.2 C147.2 41.13,74.4 40.4,74.4 39.8,75 39.8,77.6 40.37,78.17 ; U68.3 v1(86.26,75.24) ; 40.37,78.17 R209.2 ; U67.3 v1(86.23,62.37) ; U63.3 87.55,23.76 v1(86.24,23.76) ; U69.3 v1(86.3,81.68) ; U56.3 v1(23.84,51.8) ; U57.3 v1(23.84,45.3) ; U59.3 v1(23.84,26) ; U62.3 v1(86.24,17.34) ; U64.3 v1(86.26,36.64) ; U37.5 46.7,75.89 v1(46.7,75.1) ; U58.3 v1(23.84,32.4) ; U54.3 v1(23.84,71) ; U55.3 v1(23.84,64.8) ; U65.3 v1(86.23,43.07) ; U60.3 v1(23.84,13.2) ; U66.3 v1(86.24,55.94)
  TOP w0.508: v1(37.34,52.72) 37.54,52.93 C145.2 ; v1(37.72,64.15) 37.82,64.05 C144.2 ; C144.2 37.82,61.4 38.49,60.72 U36.2 ; C144.2 36.21,62.22 v1(36.2,62.24) ; 61.3,63.77 65.2,67.67 D29.A ; v1(39.24,53.1) 39.44,53.3 C146.2
  TOP w0.635: D29.A 52,70.2 50.29,71.91 50.29,78.77 51.93,80.41 C148.2 ; U8.2 39.62,41 39.61,40.99 C150.2 40.34,39.42 R357.2 v1(42.29,39.42) ; 61.3,63.77 61.3,50.85
  TOP w1: D28.1 67.36,88.3 71.1,84.57 ; 54.2,80.52 C148.2 ; 71.1,84.57 74.5,81.17 U53.5 ; 71.1,84.57 U53.6 ; 71.1,84.57 U53.6 ; U53.6 U53.3 ; 61.3,50.85 62.48,49.68 C149.2
  BOTTOM w0.254: R205.2 49.92,38.63 v1(49.53,38.24) ; C140.2 44.14,36.66 v1(43.81,36.34)
  BOTTOM w0.5: v1(86.24,17.34) v1(86.24,23.76) 86.24,80.98 86.3,81.04 v1(86.3,81.68) ; v1(40.2,79) 42.16,80.96 v1(44.94,80.96) 46.04,80.96 46.7,80.3 v1(46.7,75.1)
GND_FIELD SIGNAL: length 107.2
  TOP w0.5: U60.2 v1(12.7,14.4) ; v1(98.34,75.24) 97.27,75.24 U68.2 ; U66.2 97.26,55.94 v1(98.34,55.94) ; R354.2 103.81,68.16 MOS15.2 ; v1(105.5,8.5) 104.28,8.5 103.35,9.42 R338.2 103.35,10.92 103.8,11.37 MOS12.2 ; MOS13.2 103.39,49.21 R346.2 ; U62.2 v1(98.34,17.34) ; U64.2 97.26,36.64 v1(98.34,36.64) ; U56.2 v1(12.57,53) ; v1(98.34,43.04) 97.3,43.04 U65.2 ; U54.2 12.74,72.3 v1(12.74,72.3) ; R350.2 103.82,29.12 MOS14.2 ; v1(98.4,23.77) U63.2 ; v1(98.34,62.36) 97.27,62.36 U67.2 ; U69.2 v1(98.38,81.68) ; U59.2 v1(12.76,27.26) ; U61.2 v1(12.74,7.96) ; U58.2 v1(12.7,33.7) ; v1(52,1.5) 48.61,1.5 48.23,1.88 U94.3 ; U57.2 v1(12.77,46.57)
  TOP w0.508: MOS11.2 7.7,20.96 R334.2 v1(5.7,22.53) ; 14.14,45.65 U57.2 15.02,46.57 ; MOS1.2 7.71,79.63 R322.2 v1(5.8,80.08) ; v1(12.73,65.87) U55.2 ; U55.2 15.02,65.87 ; U55.2 14.14,64.95 ; 14.14,26.35 U59.2 15.02,27.26 ; 2.07,68.4 J29.1 ; J29.1 3.73,68.4 ; J29.1 2.9,67.57 ; 2.07,29.8 J31.1 ; J31.1 2.9,28.97 ; J31.1 3.73,29.8 ; 2.9,48.27 J30.1 ; J30.1 3.73,49.1 ; J30.1 2.07,49.1 ; MOS9.2 8.21,59.49 R326.2 v1(5.71,61.06) ; v1(5.7,41.66) R330.2 7.58,41.21 MOS10.2
  TOP w1: R354.2 103.36,67.59 104.84,66.1 v1(106,66.1) ; v1(105.8,46.9) 104.37,46.9 103.39,47.88 R346.2 ; R350.2 103.37,28.54 104.14,27.77 104.2,27.77 104.37,27.6 v1(105.8,27.6) ; v1(57.6,1.5) 54.9,1.5 R364.1 54.76,1.5 v1(52,1.5)
  BOTTOM w0.508: J30.1 3.73,49.1 ; J30.1 2.9,49.93 ; J30.1 2.9,48.27 ; J30.1 2.07,49.1 ; J32.1 107.1,22.07 ; J32.1 106.27,21.24 ; J32.1 107.1,20.41 ; J32.1 107.93,21.24 ; J33.1 107.93,40.54 ; J33.1 107.1,41.37 ; J33.1 107.1,39.71 ; J33.1 106.27,40.54 ; 2.9,28.97 J31.1 ; J31.1 2.9,30.63 ; J31.1 2.07,29.8 ; J31.1 3.73,29.8 ; J34.1 107.93,59.84 ; J34.1 106.27,59.84 ; J34.1 107.1,60.67 ; J34.1 107.1,59.01 ; 106.27,79.14 J36.1 ; J36.1 107.93,79.14 ; J36.1 107.1,79.97 ; J36.1 107.1,78.32 ; J35.1 2.9,11.32 ; J35.1 2.07,10.5 ; J35.1 3.73,10.5 ; J35.1 2.9,9.67 ; 2.07,68.4 J29.1 ; J29.1 3.73,68.4 ; J29.1 2.9,69.23 ; J29.1 2.9,67.57
VCC_+3.3V: length 50.3
  TOP w0.254: v1(29.34,28.72) 29.5,28.55 C151.1 ; v1(71.25,24.14) 71.25,23.46 71.25,23.45 C152.1 70.6,22.8 70.58,22.81 U75.16
  TOP w0.5: U9.16 29.51,27.76 C151.1
  BOTTOM w0.254: v1(71.25,24.14) 68.96,26.43 30.1,26.43 29.34,27.19 v1(29.34,28.72)
0: length 31.8
  TOP w0.254: 59.65,5.77 59.65,6.59 ; 59.65,5.77 59.65,4.96 ; 59.65,5.77 58.83,5.77 ; 59.65,5.77 60.46,5.77 ; 68.3,1.57 D31.1 ; D31.1 66.56,2.89 ; D31.1 68.3,4.21 ; D31.1 70.04,2.89 ; 56.67,7.55 R364.2 54.83,8.35
  TOP w0.5: R365.1 43.91,5.65 MOS16.2 ; R365.1 48.01,5.69 49.5,4.2 49.5,4.12 U94.4 R358.1 53.7,3 54.83,4.13 R364.2 ; R365.1 C153.2
CTRL_BOOT0: length 5.3
  TOP w0.127: U34.44 48.39,41.15 48.39,42.26 48.47,42.35 v1(48.47,42.81)
  BOTTOM w0.254: R205.1 R204.2 v1(48.47,42.81)
CTRL_WDI_3.3V: length 9.1
  TOP w0.127: U34.2 44.2,39.07 43.86,39.4 43.86,43.24 43.52,43.57
  TOP w0.254: 43.52,43.57 42.37,44.73 U8.4
DATA1: length 11.9
  TOP w0.254: U34.14 47.04,28.02 46.78,27.76 U9.9
DATA2: length 22.1
  TOP w0.254: U9.7 38.58,21.32 38.9,21 47.28,21 47.54,21.25 U34.15
DATA3: length 25.5
  TOP w0.254: U9.6 37.31,20.99 38.3,20 47.79,20 48.05,20.25 48.05,22.63 48.04,22.64 U34.16
DATA4: length 18.4
  TOP w0.254: U34.21 50.54,25.36 53.09,22.81 U75.9
DATA5: length 15
  TOP w0.127: 54.1,30.24 51.82,30.24 51.05,31 51.05,31.65 51.04,31.67 U34.22
  TOP w0.254: 54.1,30.24 61.34,30.24 61.92,29.66 U75.7
DATA6: length 14.4
  TOP w0.127: 54.1,31.76 53.47,32.4 U34.25
  TOP w0.254: 54.1,31.76 54.86,31 61.72,31 63.19,29.54 U75.6
I2C1_SCL: length 18
  TOP w0.127: 48.04,43.57 48.01,43.54 48.01,42 48.04,41.97 U34.45
  TOP w0.254: J28.1 48.04,55.58 48.04,43.57
I2C1_SDA: length 15.3
  TOP w0.127: 47.54,43.57 U34.46
  TOP w0.229: 47.54,43.57 47.54,53.58 J28.2
LIVE_LED: length 70.8
  TOP w0.127: v1(51.44,39) 49.04,36.61 U34.18 ; 51.44,43.57 51.44,41.1 U34.38
  TOP w0.254: v1(51.44,43.96) 51.44,43.57
  BOTTOM w0.254: D27.C 27.23,84.16 28.96,82.44 34.29,82.44 35.81,80.91 35.81,72.91 51.44,57.29 v1(51.44,43.96) v1(51.44,39)
LOCK_CTRL_1: length 58.4
  TOP w0.254: R299.2 27.13,81.15 27.63,80.65 27.63,78.87 29,77.5 29,74.4 31.6,71.8 31.6,45.5 32.7,44.4 32.7,39.3 35.2,36.8 39.16,36.8 40.89,35.07 42.29,35.07 U34.10
LOCK_CTRL_2: length 42.1
  TOP w0.254: U34.11 42.29,34.57 40.25,34.57 39.22,35.6 v1(38.7,35.6) ; v1(33,35.6) 30.34,38.26 30.34,43.66 29.5,44.5 29.5,60.9 28.43,61.97 R325.2
  BOTTOM w0.254: v1(33,35.6) v1(38.7,35.6)
LOCK_CTRL_3: length 25.5
  TOP w0.254: U34.12 42.29,34.07 39.43,34.07 v1(38.7,34.8) ; v1(28.2,34.8) 28.2,40.9 27.13,41.97 R329.2
  BOTTOM w0.254: v1(28.2,34.8) v1(38.7,34.8)
LOCK_CTRL_4: length 28.4
  TOP w0.254: R333.2 v1(28.1,23.37) ; v1(39.4,32.8) 46.38,32.8 U34.13
  BOTTOM w0.254: v1(28.1,23.37) 28.1,31.9 29,32.8 v1(39.4,32.8)
LOCK_CTRL_5: length 52.1
  TOP w0.127: 50.04,29.86 U34.20
  TOP w0.254: 50.04,29.86 50.04,23.25 51.82,21.48 52.2,21.48 v1(52.96,20.71) ; R337.2 v1(83.46,8.36)
  BOTTOM w0.254: v1(83.46,8.36) 83.46,12.33 78.89,16.9 63.25,16.9 59.44,20.71 v1(52.96,20.71)
LOCK_CTRL_6: length 33.7
  TOP w0.127: 54.1,34.57 U34.26
  TOP w0.254: 54.1,34.57 55.11,34.57 57.15,32.53 62.87,32.53 v1(63.63,31.76) ; R349.2 v1(83.5,27.67)
  BOTTOM w0.254: v1(83.5,27.67) 80.17,31 75.8,31 75.8,31 72.01,31 71.25,31.76 v1(63.63,31.76)
LOCK_CTRL_7: length 46.3
  TOP w0.127: U34.27 54.1,35.07
  TOP w0.254: v1(81.4,31.8) 81.4,45.2 83.16,46.96 R345.2 ; 54.1,35.07 55.75,35.07 57.53,33.29 62.87,33.29 63.25,32.91 v1(64.39,32.91)
  BOTTOM w0.254: v1(64.39,32.91) 64.77,32.53 72.01,32.53 72.74,31.8 v1(81.4,31.8)
LOCK_CTRL_8: length 63.5
  TOP w0.127: 54.1,35.57 U34.28
  TOP w0.254: v1(65.91,33.29) 65.15,34.05 57.53,34.05 56.01,35.57 54.1,35.57 ; R353.2 83.47,66.27 83.3,66.1 83.3,58 79.4,54.1 v1(79.4,32.5)
  BOTTOM w0.254: v1(65.91,33.29) 74.11,33.29 74.9,32.5 v1(79.4,32.5)
LOCK_DRV1: length 7.2
  TOP w0.5: U70.3 13.06,81.28 13.03,81.3 10.01,81.3 9.61,80.9 R322.1 MOS1.1
LOCK_DRV2: length 6.9
  TOP w0.5: MOS9.1 R326.1 9.66,61.19 10.45,61.97 U71.3
LOCK_DRV3: length 7
  TOP w0.5: MOS10.1 R330.1 9.48,41.78 10.07,42.38 10.2,42.38 10.49,42.67 U72.3
LOCK_DRV4: length 7.4
  TOP w0.5: U73.3 9.99,23.37 9.87,23.25 9.75,23.25 9.15,22.66 R334.1 MOS11.1
LOCK_DRV5: length 7
  TOP w0.5: U74.3 98.96,8.36 100.15,9.55 R338.1 101.91,11.37 MOS12.1
LOCK_DRV6: length 6.9
  TOP w0.5: MOS14.1 101.92,30.37 R350.1 101.92,28.54 101.33,27.95 101.21,27.95 100.92,27.67 U77.3
LOCK_DRV7: length 6.9
  TOP w0.5: 101.94,48.01 MOS13.1 ; 101.94,48.01 101.94,47.88 101.35,47.29 101.22,47.29 100.9,46.97 U76.3 ; 101.94,48.01 R346.1 101.94,48.01
LOCK_DRV8: length 7.5
  TOP w0.5: U78.3 101.29,66.27 101.91,66.88 R354.1 101.91,69.37 MOS15.1
LOCK_OCD: length 32.8
  TOP w0.127: 48.77,29.86 48.54,30.09 U34.17
  TOP w0.254: R361.1 U82.4 ; 35.21,17.67 47.62,17.67 48.77,18.81 48.77,29.86
  TOP w0.635: R361.1 33.74,16.19 35.21,17.67
LOCK_OP_1: length 47.3
  TOP w0.254: U9.11 37.31,32.49 31.2,38.6 31.2,43.8 30.1,44.9 30.1,62.4 25.68,66.82 R252.2
  TOP w0.5: U55.4 R252.2
LOCK_OP_2: length 28.7
  TOP w0.254: U9.13 34.77,31.63 29.1,37.3 29.1,43.1 25.68,46.52 R254.2 25.68,50.8
  TOP w0.5: U57.4 R254.2
LOCK_OP_3: length 18
  TOP w0.254: U9.2 32.23,21.35 31.98,21.1 29.05,21.1 28.8,21.35 28.8,23.9 28.1,24.6 25.9,24.6 25.68,24.82 R261.2
  TOP w0.5: U59.4 R261.2
LOCK_OP_4: length 19.3
  TOP w0.254: U9.4 34.77,20.06 29.52,14.8 27.1,14.8 25.68,13.38 R259.2
  TOP w0.5: U61.4 R259.2
LOCK_OP_5: length 31.7
  TOP w0.254: U75.11 63.19,18.91 64.6,17.5 84.2,17.5 85.7,19 85.7,20.5 85.72,20.53 R269.2
  TOP w0.5: U63.4 R269.2
LOCK_OP_6: length 40
  TOP w0.254: U75.13 65.73,23.5 66.93,24.7 80.9,24.7 82.1,25.9 82.1,41 82.9,41.8 85.3,41.8 85.72,41.38 R267.2
  TOP w0.5: U65.4 R267.2
LOCK_OP_7: length 47.4
  TOP w0.254: R277.2 85.72,59.13 80.1,53.51 80.1,30.5 79.3,29.7 68.6,29.7 68.27,29.37 U75.2
  TOP w0.5: U67.4 R277.2
LOCK_OP_8: length 69.6
  TOP w0.254: R275.2 85.72,78.22 85,77.5 82.65,77.5 82,76.85 82,58.5 77.9,54.4 77.9,31.55 77.65,31.3 66.2,31.3 65.73,30.83 U75.4
  TOP w0.5: U69.4 R275.2
LOCK_OP_RET_1: length 4.3
  TOP w0.5: J29.2 R256.2
LOCK_OP_RET_2: length 4.3
  TOP w0.5: J30.2 R258.2
LOCK_OP_RET_3: length 4.2
  TOP w0.5: J31.2 R264.2
LOCK_OP_RET_4: length 4.2
  TOP w0.5: R266.2 J35.2
LOCK_OP_RET_5: length 2.8
  TOP w0.5: R272.2 J32.2
LOCK_OP_RET_6: length 2.8
  TOP w0.5: J33.2 R274.2
LOCK_OP_RET_7: length 2.8
  TOP w0.5: R280.2 J34.2
LOCK_OP_RET_8: length 2.8
  TOP w0.5: R282.2 J36.2
LOCK_RET_1: length 10.6
  TOP w0.5: D18.A 4.8,78.63 7.21,76.22 R283.1 J29.4
LOCK_RET_2: length 10.9
  TOP w0.5: D19.A 4.7,57.79 7.26,55.22 R323.1 J30.4
LOCK_RET_3: length 10.8
  TOP w0.5: J31.4 R327.1
  TOP w0.508: R327.1 7.08,35.92 4.3,38.7 D20.A
LOCK_RET_4: length 14.9
  TOP w0.254: 6.5,17.21 6.5,17.27 4.2,19.57
  TOP w0.5: R331.1 J35.4 ; 6.5,17.21 7.1,16.62
  TOP w0.508: D21.A 4.2,19.57 ; R331.1 7.1,16.62 4.2,19.52
LOCK_RET_5: length 8.7
  TOP w0.5: D25.A 105.51,9.81 105.51,13.91 104.3,15.11 R335.1 J32.4
LOCK_RET_6: length 8.3
  TOP w0.5: D24.A 105.54,29.36 105.54,34.03 105.03,34.54 ; R347.1 105.03,34.54 ; 105.03,34.54 J33.4
LOCK_RET_7: length 8.5
  TOP w0.5: D23.A 105.57,48.63 105.57,52.48 104.34,53.72 104.34,53.84 R343.1 J34.4
LOCK_RET_8: length 8.3
  TOP w0.5: D22.A 105.51,67.81 105.51,72.64 105.01,73.14 ; 105.01,73.14 R351.1 ; 105.01,73.14 J36.4
LOCK_STAT_RET_1: length 4.3
  TOP w0.5: J29.3 R255.2
LOCK_STAT_RET_2: length 4.3
  TOP w0.5: J30.3 R257.2
LOCK_STAT_RET_3: length 4.2
  TOP w0.5: J31.3 R263.2
LOCK_STAT_RET_4: length 4.2
  TOP w0.5: R265.2 J35.3
LOCK_STAT_RET_5: length 2.8
  TOP w0.5: R271.2 J32.3
LOCK_STAT_RET_6: length 2.8
  TOP w0.5: J33.3 R273.2
LOCK_STAT_RET_7: length 2.8
  TOP w0.5: R279.2 J34.3
LOCK_STAT_RET_8: length 2.8
  TOP w0.5: R281.2 J36.3
LOCK_STATUS_1: length 54.3
  TOP w0.254: U9.10 38.58,32.42 31.9,39.1 31.9,44.2 31,45.1 31,68 25.68,73.32 R251.2
  TOP w0.5: U54.4 R251.2
LOCK_STATUS_2: length 34
  TOP w0.254: U9.12 36.04,31.56 29.8,37.8 29.8,43.3 28.7,44.4 28.7,51.2 25.78,54.12 25.78,55.54
  TOP w0.5: 25.78,55.54 R253.2 U56.4
LOCK_STATUS_3: length 18.9
  TOP w0.254: U9.1 29.85,22.81 29.6,23.07 29.6,24.5 28.6,25.5 28.6,30.7 27.7,31.6 26.3,31.6 25.68,32.22 R262.2
  TOP w0.5: U58.4 R262.2
LOCK_STATUS_4: length 15.2
  TOP w0.254: R260.2 25.68,16.05 25.93,15.8 29.37,15.8 33.5,19.93 U9.3
  TOP w0.5: U60.4 R260.2
LOCK_STATUS_5: length 31.4
  TOP w0.254: U75.10 61.92,19.28 64.3,16.9 84.32,16.9 85.72,15.5 R270.2
  TOP w0.5: U62.4 R270.2
LOCK_STATUS_6: length 43.9
  TOP w0.254: R268.2 85.72,34.88 85.35,35.25 83.45,35.25 82.8,34.6 82.8,20 81,18.2 65.1,18.2 64.46,18.84 U75.12
  TOP w0.5: U64.4 R268.2
LOCK_STATUS_7: length 44.1
  TOP w0.254: R278.2 85.72,54.1 85.23,54.6 82.8,54.6 80.7,52.5 80.7,28.5 79.96,27.76 U75.1
  TOP w0.5: U66.4 R278.2
LOCK_STATUS_8: length 63.9
  TOP w0.254: U75.3 67,30.15 67.25,30.4 77.6,30.4 78.5,31.3 78.5,54 82.7,58.2 82.7,73 83.5,73.8 85.4,73.8 85.72,73.48 R276.2
  TOP w0.5: U68.4 R276.2
RS485_A: length 13
  TOP w0.381: 46.2,81.51 45.69,82.02 R208.1 ; 46.2,81.51 46.2,79.17 45.86,78.83 ESD3.2 45.48,77.57 U37.6 ; 46.2,81.51 46.37,81.35 46.58,81.35 47.74,80.18 R207.2
  TOP w0.5: R208.1 45.69,85.73 45.89,85.93 J26.2
RS485_B: length 14.3
  TOP w0.381: U37.7 44.21,76.38 44.03,76.56 ESD3.1 44.03,78.87 43.59,79.31 43.59,82.02 ; 41.65,80.27 R209.1
  TOP w0.508: R208.2 42.07,82.22 41.45,81.6 R209.1 ; R208.2 43.59,84.8 43.39,85 J26.1 ; R208.2 43.59,82.02
RS485_EN: length 40.2
  TOP w0.127: U34.41 50.04,43.57
  TOP w0.254: R210.1 41.2,71.77 43.88,71.77 44.21,71.45 U37.2 U37.3 45.48,71.42 45.76,71.7 47.24,71.7 48.01,70.94 48.01,68.81 50.04,66.77 50.04,43.57
RS485_RXD: length 32
  TOP w0.127: 48.9,43.57 49.04,43.44 U34.43
  TOP w0.254: U37.1 42.94,69.1 48.9,63.14 48.9,43.57
RS485_TXD: length 30.6
  TOP w0.127: U34.42 49.54,43.57
  TOP w0.254: 49.54,43.57 49.54,65.55 46.75,68.34 U37.4
STM32_RST: length 43
  TOP w0.127: 42.29,37.1 43.81,37.1 44.35,36.57 U34.7 ; v1(53.34,42.43) 54.1,43.19
  TOP w0.254: J27.8 62.87,40.47 62.87,42.43 61.72,43.57 54.48,43.57 54.1,43.19 ; R355.2 35.43,38.24 35.81,37.86 40.39,37.86 41.15,37.1 v1(41.91,37.1) 42.29,37.1
  BOTTOM w0.254: v1(53.34,42.43) 53.34,39 51.44,37.1 v1(41.91,37.1)
SWCLK: length 17.7
  TOP w0.127: U34.37 52.04,42.27 53.34,43.57
  TOP w0.254: J27.7 63.63,40.98 63.63,42.43 61.72,44.34 54.1,44.34 53.34,43.57
SWDIO: length 22.6
  TOP w0.127: 54.1,38.57 U34.34
  TOP w0.254: 54.1,38.57 54.16,38.57 57.91,34.81 67.44,34.81 68.2,35.57 68.2,36.34 68.58,36.72 68.58,38.62 68.2,39 66.67,39 J27.5
N260241: length 1.7
  TOP w0.508: U36.5 C146.1
N347898: length 4.1
  TOP w0.127: D26.A R312.2
N347900: length 5
  TOP w0.635: D27.A 31.9,84.17 R313.2
N349606: length 42
  TOP w0.635: v1(80.39,80.53) 80.55,80.37 R314.1
  TOP w1: F1.1 D28.2 60.61,83.21 57.75,86.07 J37.2
  BOTTOM w0.635: v1(80.39,80.53) 60.08,80.53 J37.2
N349618: length 13.5
  TOP w1: C148.1 F1.2 U53.1
N349698: length 17.3
  TOP w0.508: D29.C 68.03,70.2 68.08,70.24 69.4,70.24
  TOP w1: L10.1 65.67,61.8 68.4,61.8 69.4,62.8 U53.2
N351019: length 4.6
  TOP w0.635: R314.2 82.6,84.18 83.37,84.95 D30.A
N370351: length 6.5
  TOP w0.5: R255.1 9.8,72.4 12.24,74.84 U54.1
N370463: length 7.2
  TOP w0.5: U55.1 9.09,68.41 8.66,68.84 R256.1
N371249: length 6.6
  TOP w0.5: R265.1 10.1,14.5 12.5,16.9 13.02,16.9 13.06,16.94 U60.1
N371337: length 6.4
  TOP w0.5: U61.1 12.9,10.5 10.9,12.5 R266.1
N372751: length 6.3
  TOP w0.5: U57.1 11.49,49.11 9.5,51.1 8.66,51.1 R258.1
N373087: length 6.5
  TOP w0.5: U56.1 12.24,55.54 9.8,53.1 9.36,53.1 9.36,53.1 R257.1
N374541: length 6.6
  TOP w0.5: R263.1 10,33.8 12.4,36.2 13.02,36.2 13.06,36.24 U58.1
N374619: length 6.4
  TOP w0.5: U59.1 13.06,29.8 13.05,29.8 11.9,29.8 9.9,31.8 R264.1
N384334: length 1.7
  TOP w0.254: U70.4 R287.1
N384366: length 1.8
  TOP w0.5: U70.2 R299.1
N385358: length 1.9
  TOP w0.5: MOS1.3 R283.2
N386684: length 6.6
  TOP w0.5: U66.1 97.26,53.43 99.67,55.84 R279.1
N386792: length 6.4
  TOP w0.5: U67.1 97.26,59.8 99.22,57.84 R280.1
N386994: length 6.6
  TOP w0.5: U68.1 99.2,72.7 101.64,75.14 R281.1
N387120: length 6.4
  TOP w0.5: R282.1 101.66,77.14 99.7,79.1 98.38,79.1 98.34,79.14 U69.1
N388890: length 6.6
  TOP w0.5: R273.1 100.88,36.54 98.44,34.1 U64.1
N389042: length 6.4
  TOP w0.5: U65.1 98.89,40.53 100.88,38.54 R274.1
N391500: length 1.8
  TOP w0.5: MOS9.3 R323.2
N391578: length 1.9
  TOP w0.5: R324.1 U71.4
N391632: length 1.9
  TOP w0.5: 25.73,61.97 R325.1 U71.2
N392535: length 1.9
  TOP w0.5: R327.2 MOS10.3
N392613: length 1.7
  TOP w0.5: U72.4 R328.1
N392667: length 1.9
  TOP w0.5: 25.79,42.67 R329.1 U72.2
N394132: length 2
  TOP w0.5: MOS11.3 8.54,18.05 R331.2
N394210: length 1.8
  TOP w0.5: U73.4 R332.1
N394264: length 1.8
  TOP w0.5: U73.2 R333.1
N395070: length 6.6
  TOP w0.5: U62.1 98.44,14.8 100.88,17.24 R271.1
N395178: length 6.4
  TOP w0.5: R272.1 100.88,19.24 98.89,21.23 U63.1
N396604: length 1.8
  TOP w0.5: MOS12.3 102.85,15.24 R335.2
N396682: length 1.9
  TOP w0.5: U74.4 R336.1
N396736: length 1.8
  TOP w0.5: U74.2 R337.1
N412537: length 2.1
  TOP w0.5: MOS13.3 R343.2
N412615: length 2
  TOP w0.5: R344.1 U76.4
N412669: length 1.7
  TOP w0.5: R345.1 85.73,46.97 U76.2
N414015: length 2.1
  TOP w0.5: MOS14.3 R347.2
N414093: length 1.9
  TOP w0.5: U77.4 R348.1
N414147: length 1.8
  TOP w0.5: U77.2 R349.1
N414563: length 1.7
  TOP w0.5: MOS15.3 R351.2
N414641: length 2
  TOP w0.5: R352.1 U78.4
N414695: length 1.7
  TOP w0.5: U78.2 R353.1
N415975: length 2.2
  TOP w0.5: U9.14 33.5,29.76 R339.1
N415995: length 1.4
  TOP w0.5: R340.2 32.23,31.34 33.63,31.34 R339.2
N416039: length 2.1
  TOP w0.5: U9.15 R340.1
N416099: length 2
  TOP w0.254: R341.1 66.94,21.38 67,21.44 U75.14
N416119: length 3.8
  TOP w0.254: R341.2 66.94,19.35 68.34,19.35 R342.2 69.04,19.35 69.39,19.7 TP18.1
N416157: length 2
  TOP w0.254: R342.1 68.34,21.5 68.27,21.57 U75.15
N423449: length 4.8
  TOP w0.635: R355.1 36.93,43.16 C7.1 36.96,44.68 R356.2 37.69,44.72 37.7,44.73 U8.6
N423585: length 1.8
  TOP w0.635: U8.3 41.15,41.85 R357.1
N513484: length 4.8
  TOP w0.5: MOS16.3 40.04,4.02 40.06,4 40.06,2.36 39.7,2 R363.2
N513492: length 1.8
  TOP w0.5: U82.2 R363.1
N513610: length 3.2
  TOP w0.5: R362.2 R367.1 46.96,10.56 U94.7
N513618: length 10.8
  TOP w0.5: R362.1 v1(42.16,10.56) ; v1(42.16,2.84) MOS16.1
  BOTTOM w0.5: v1(42.16,10.56) v1(42.16,2.84)
N514476: length 19.6
  TOP w0.254: 59.67,9.75 F2.1 ; F2.1 62.15,10.68 ; F2.1 D31.2 ; F2.1 62.15,5.77 ; D31.2 68.3,11.07 ; D31.2 68.3,8.43 ; D31.2 70.04,9.75 ; 61.33,5.77 62.15,5.77 ; 62.15,5.77 62.96,5.77
N516445: length 6.1
  TOP w0.5: R358.2 R359.1 49.79,5.61 48.23,7.17 U94.6
N517983: length 17.3
  TOP w0.5: v1(43.9,3) U94.1 45.69,1.88 45.51,1.7 R366.2 ; v1(50.9,9.4) 50.9,10.51 R368.1
  BOTTOM w0.5: v1(50.9,9.4) 50.9,4.3 49.6,3 v1(43.9,3)
N517995: length 5.8
  TOP w0.5: R365.2 44.78,4.24 44.84,4.3 46.6,4.3 46.96,3.94 U94.2 R366.1
N519099: length 3.1
  TOP w0.5: U94.5 49.5,10.56 R368.2 R367.2

## Copper pours and planes (outline as drawn; the poured copper is in the pictures)
+VCC_ISO_12V on TOP: 72.2,12.7 72.7,12.2 72.7,3.2 73.4,2.5 102.6,2.5 102.8,2.7 102.8,4.7 102.6,4.9 78.9,4.9 77.5,6.3 77.5,13.4 74.8,16.1 44.5,16.1 39.6,11.2 32.8,11.2 26.1,4.5 13.3,4.5 11.1,6.7 11.1,11.1 7.9,11.1 7.6,10.8 7.6,3.7 9.6,1.7 34.1,1.7 35,2.6 35,5.2 37.2,7.4 49.6,7.4 51,8.8 51,12.7
+VCC_ISO_12V on BOTTOM: 100.6,70.5 100.6,1.9 103,1.9 103,6.3 104.4,7.7 104.4,70.3 103.9,70.8 100.9,70.8
+VCC_ISO_12V on BOTTOM: 7.1,82.4 7.1,9.8 7.4,9.5 11.2,9.5 11.9,10.2 11.9,82.4
GND on BOTTOM: 23,6.4 23,83 24.8,83 24.8,6.4
GND_FIELD SIGNAL on TOP: 1.7,30.6 5.6,30.6 8.1,28.1 15,28.1 15.3,27.8 15.3,26.1 14.9,25.7 2.6,25.7 1.7,26.6
GND_FIELD SIGNAL on TOP: 1.5,69.3 5.4,69.3 7.9,66.8 14.8,66.8 15.1,66.5 15.1,64.8 14.7,64.4 2.4,64.4 1.5,65.3
GND_FIELD SIGNAL on TOP: 1.5,50 5.4,50 7.9,47.5 14.8,47.5 15.1,47.2 15.1,45.5 14.7,45.1 2.4,45.1 1.5,46
GND_FIELD SIGNAL on BOTTOM: 96.2,82.7 108.2,82.7 109.5,81.4 109.5,8.4 108.2,7.1 106.8,7.1 105.4,8.5 105.4,80.1 105.1,80.4 100,80.4 99.2,79.6 99.2,8.1 98.5,7.4 98.5,1.4 97.7,0.6 7.4,0.6 7.4,6.1 6.7,6.8 1.5,6.8 0.5,7.8 0.5,82.2 1.1,82.8 6,82.8 6.4,82.4 6.4,9.5 7.2,8.7 12.3,8.7 12.4,8.8 12.4,84 12.8,84.4 17.3,84.4 17.9,83.8 17.9,5.5 18.2,5.2 95.3,5.2 96.2,6.1
0 on TOP: 52.9,8.5 60.5,8.5 60.8,8.2 60.8,4.9 61.6,4.1 63.9,4.1 64.3,4.5 70.8,4.5 70.8,1.4 70.7,1.3 59.4,1.3 58,2.7 52.9,2.7
N514476 on TOP: 59,11.3 69.9,11.3 70.2,11 70.2,5.8 69.4,5 62.8,5 62.7,4.9 61.5,4.9 61.2,5.2 61.2,8.6 60.9,8.9 59.6,8.9 59,9.5

## Text on the board
NCLEGEND-1-2: FIGURE | FINISHED_SIZE | 9.799 | 25.197 | 31.496 | 36.614 | 39.37 | 39.0 | 93.5 | 125.984 | DRILL CHART: TOP to BOTTOM | ALL UNITS ARE IN MILS | PLATED | NON-PLATED | QTY | 119 | 6 | 32 | 8 | 1 | 3 | 4
